# Altium PCB LEDCube.PcbDoc (part 1 of 2)
Units mil, origin at the board's own origin, x right, y up, seen from the top; angles counter-clockwise.
Board outline 4000 x 4000 mil, 4 copper layers (Top Layer, GND, +5, Bottom Layer); 176 components, 214 nets, 658 pads, 213 vias.
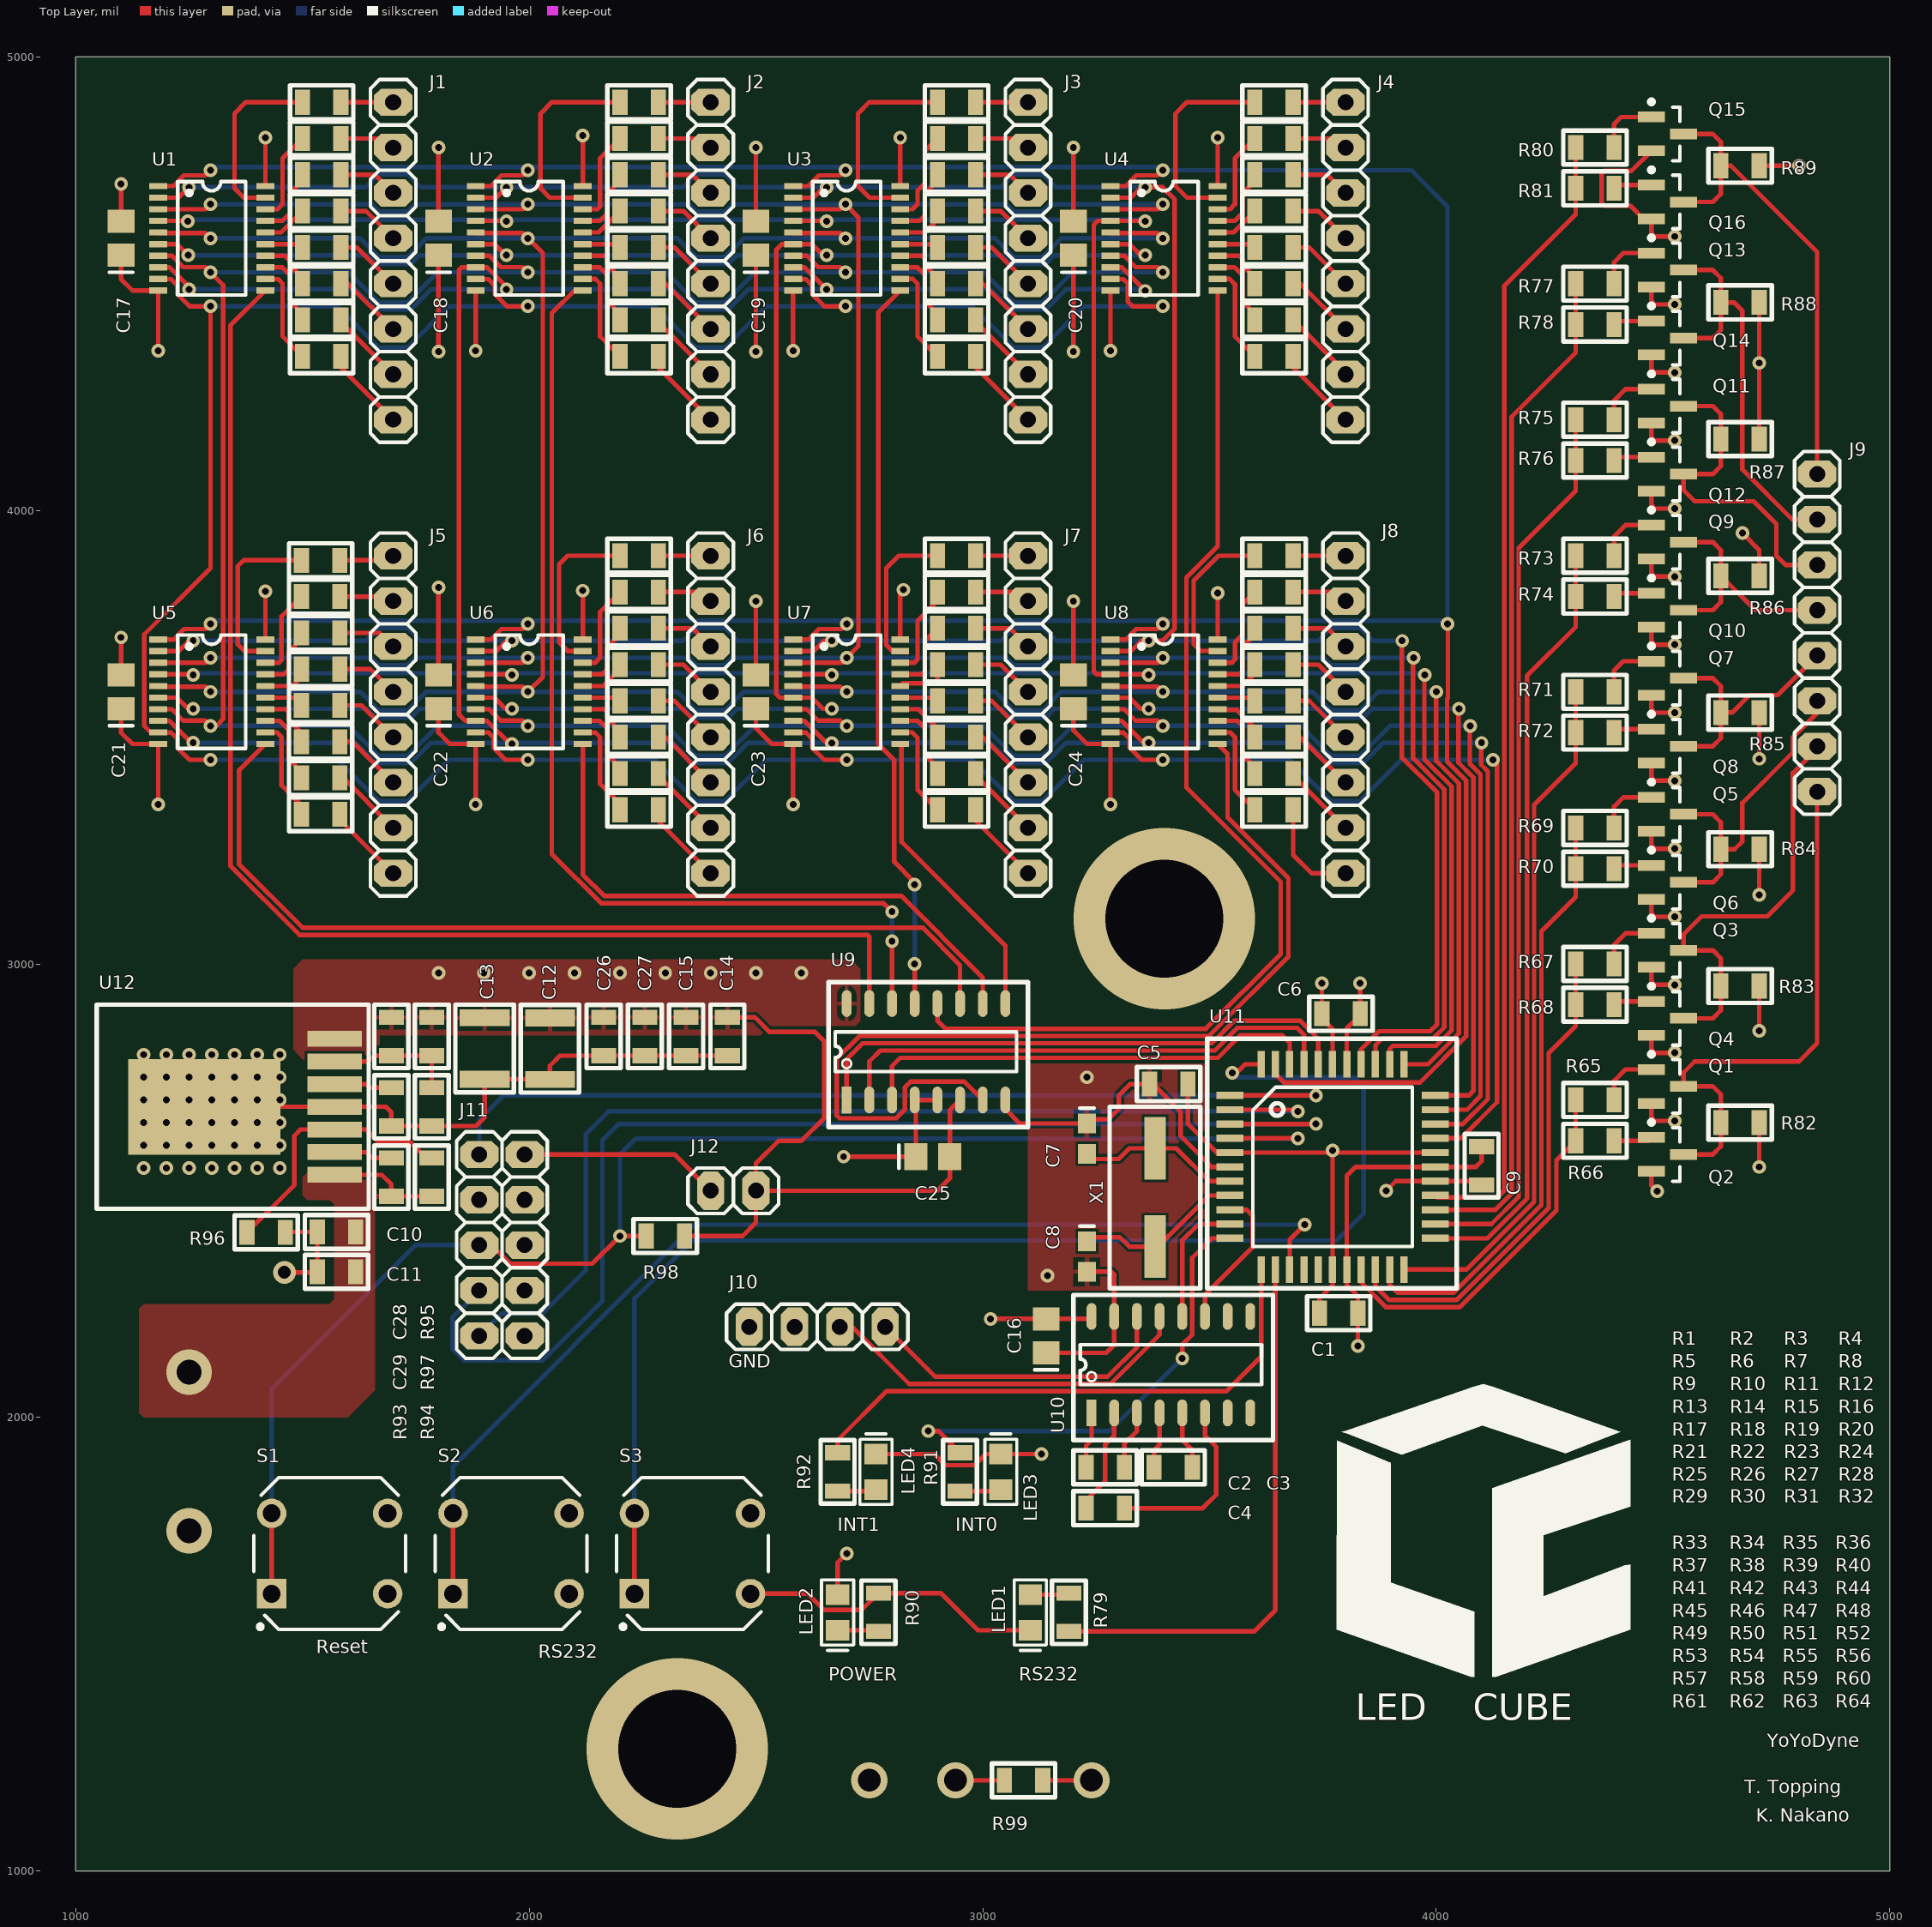
[diagram p0: Top Layer view]
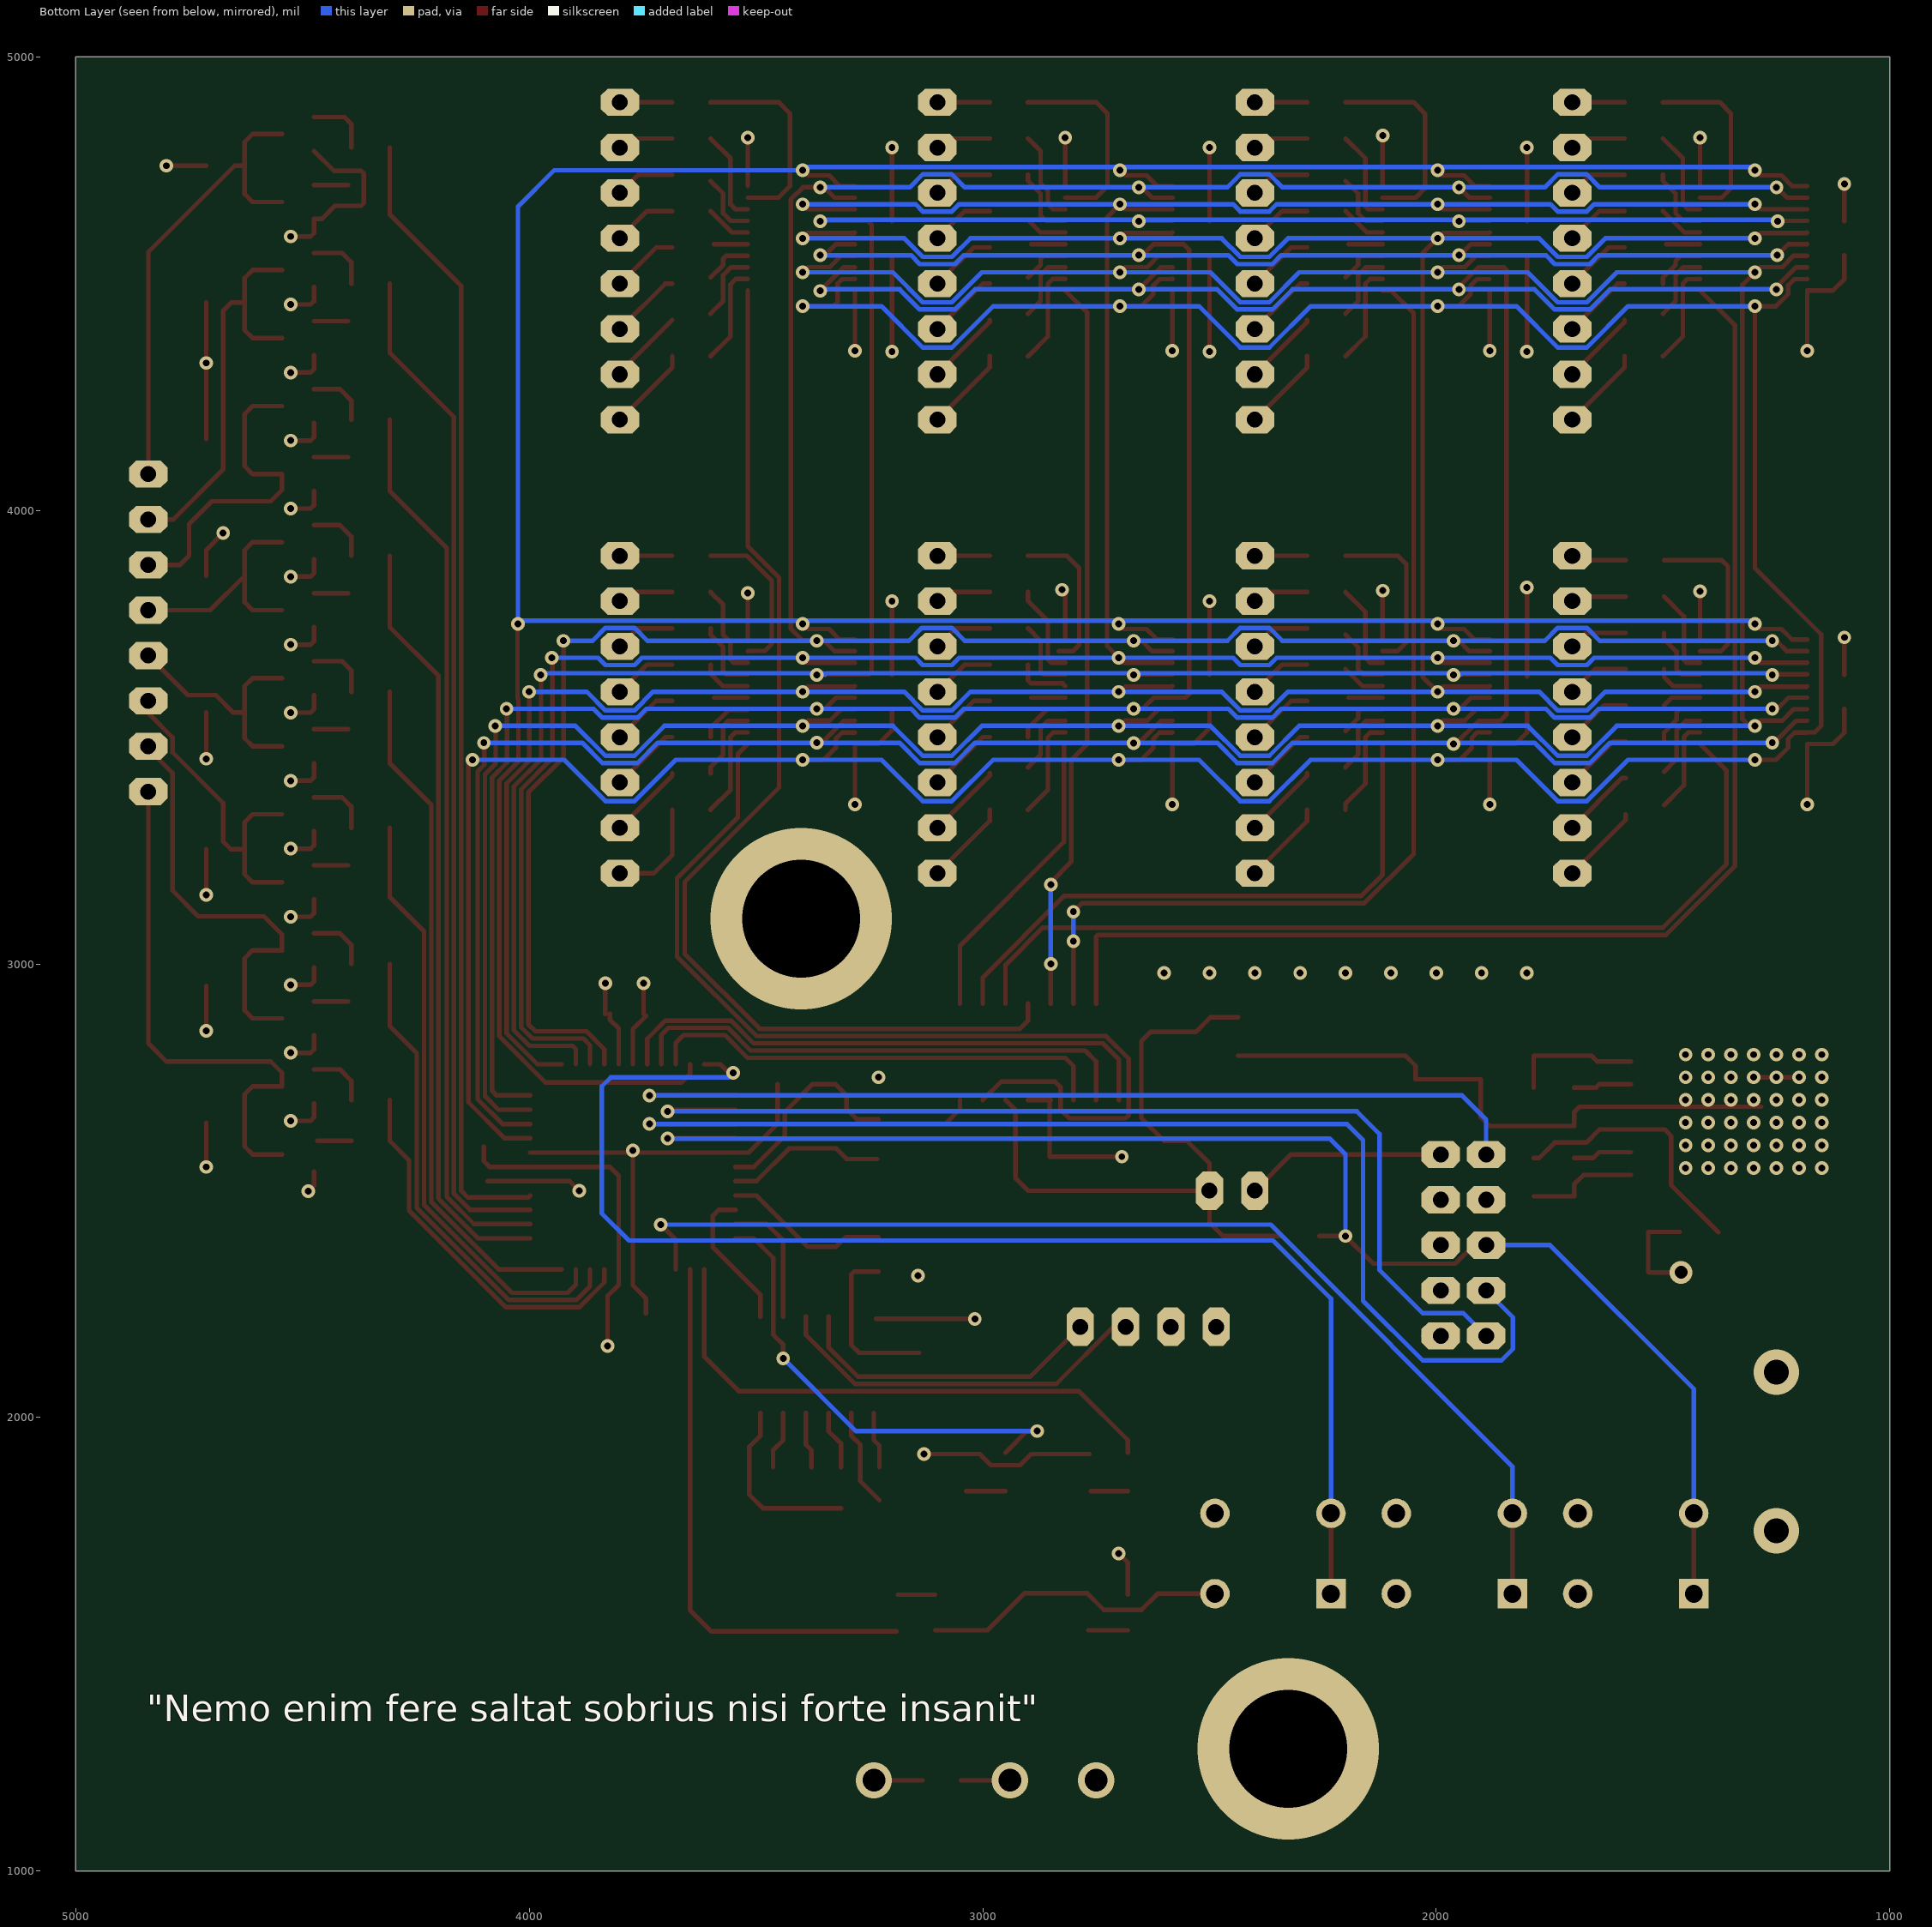
[diagram p1: Bottom Layer view, seen from below]
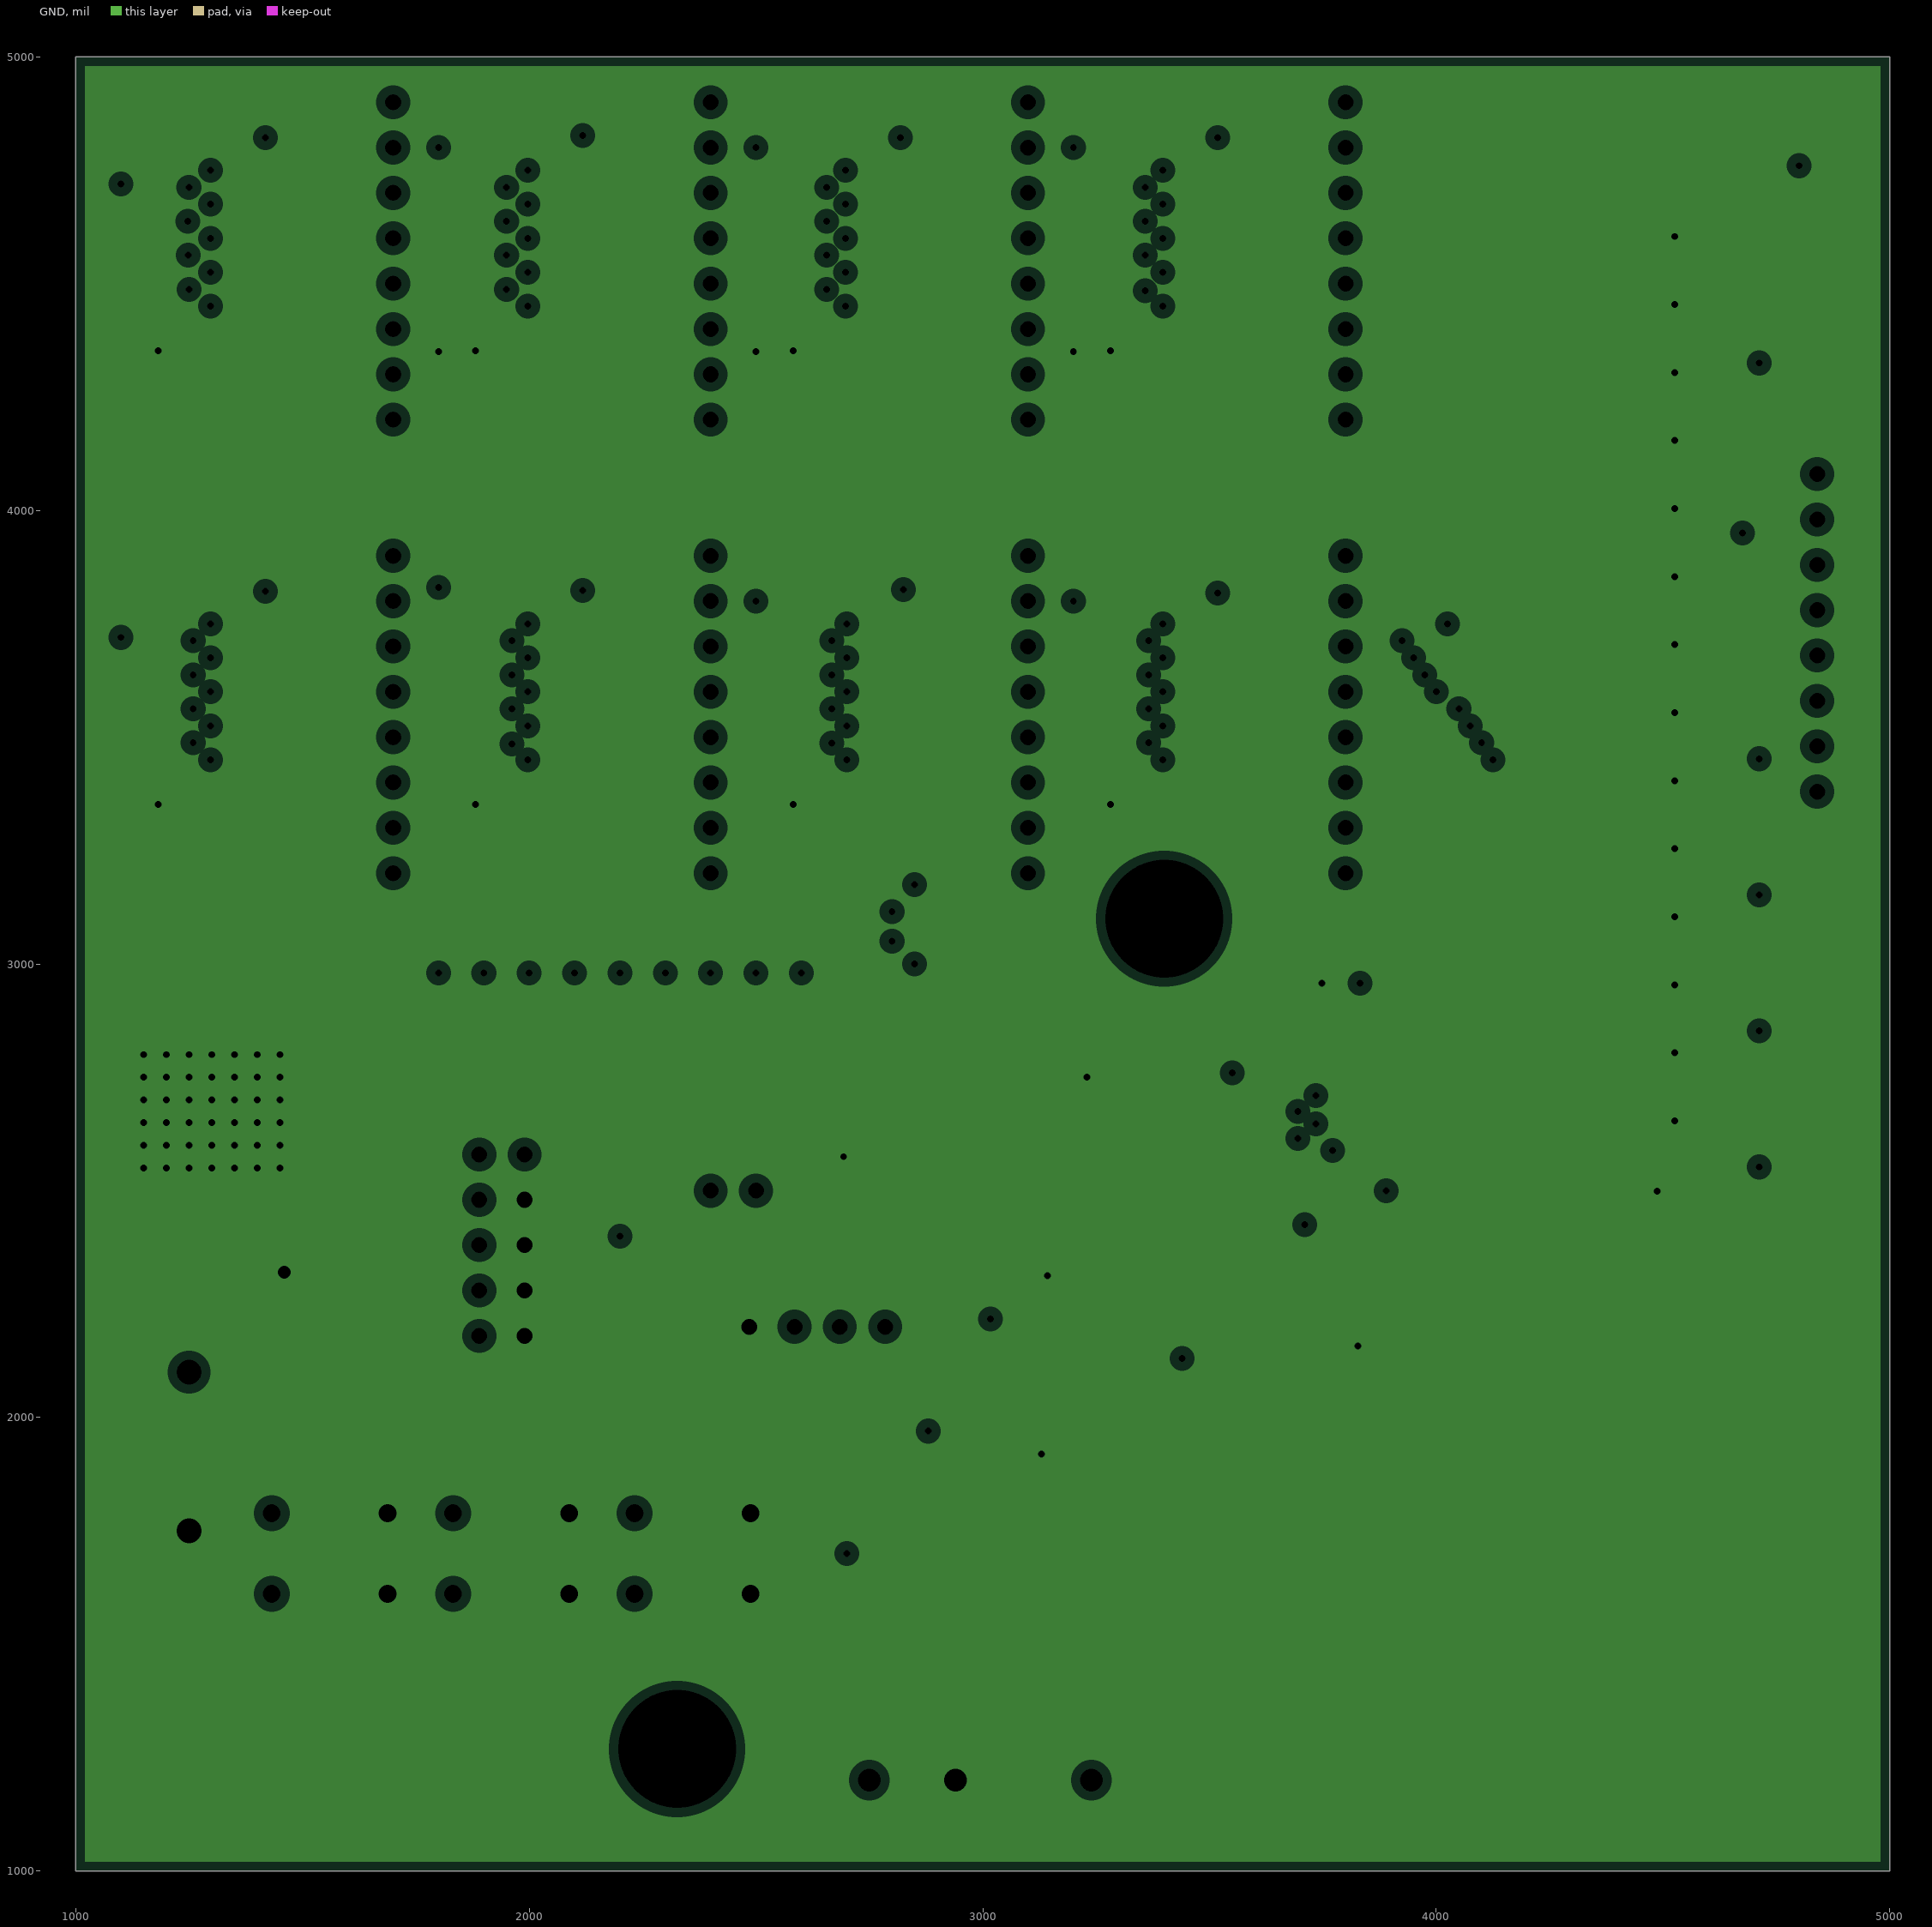
[diagram p2: GND, clearances drawn from the general rule]
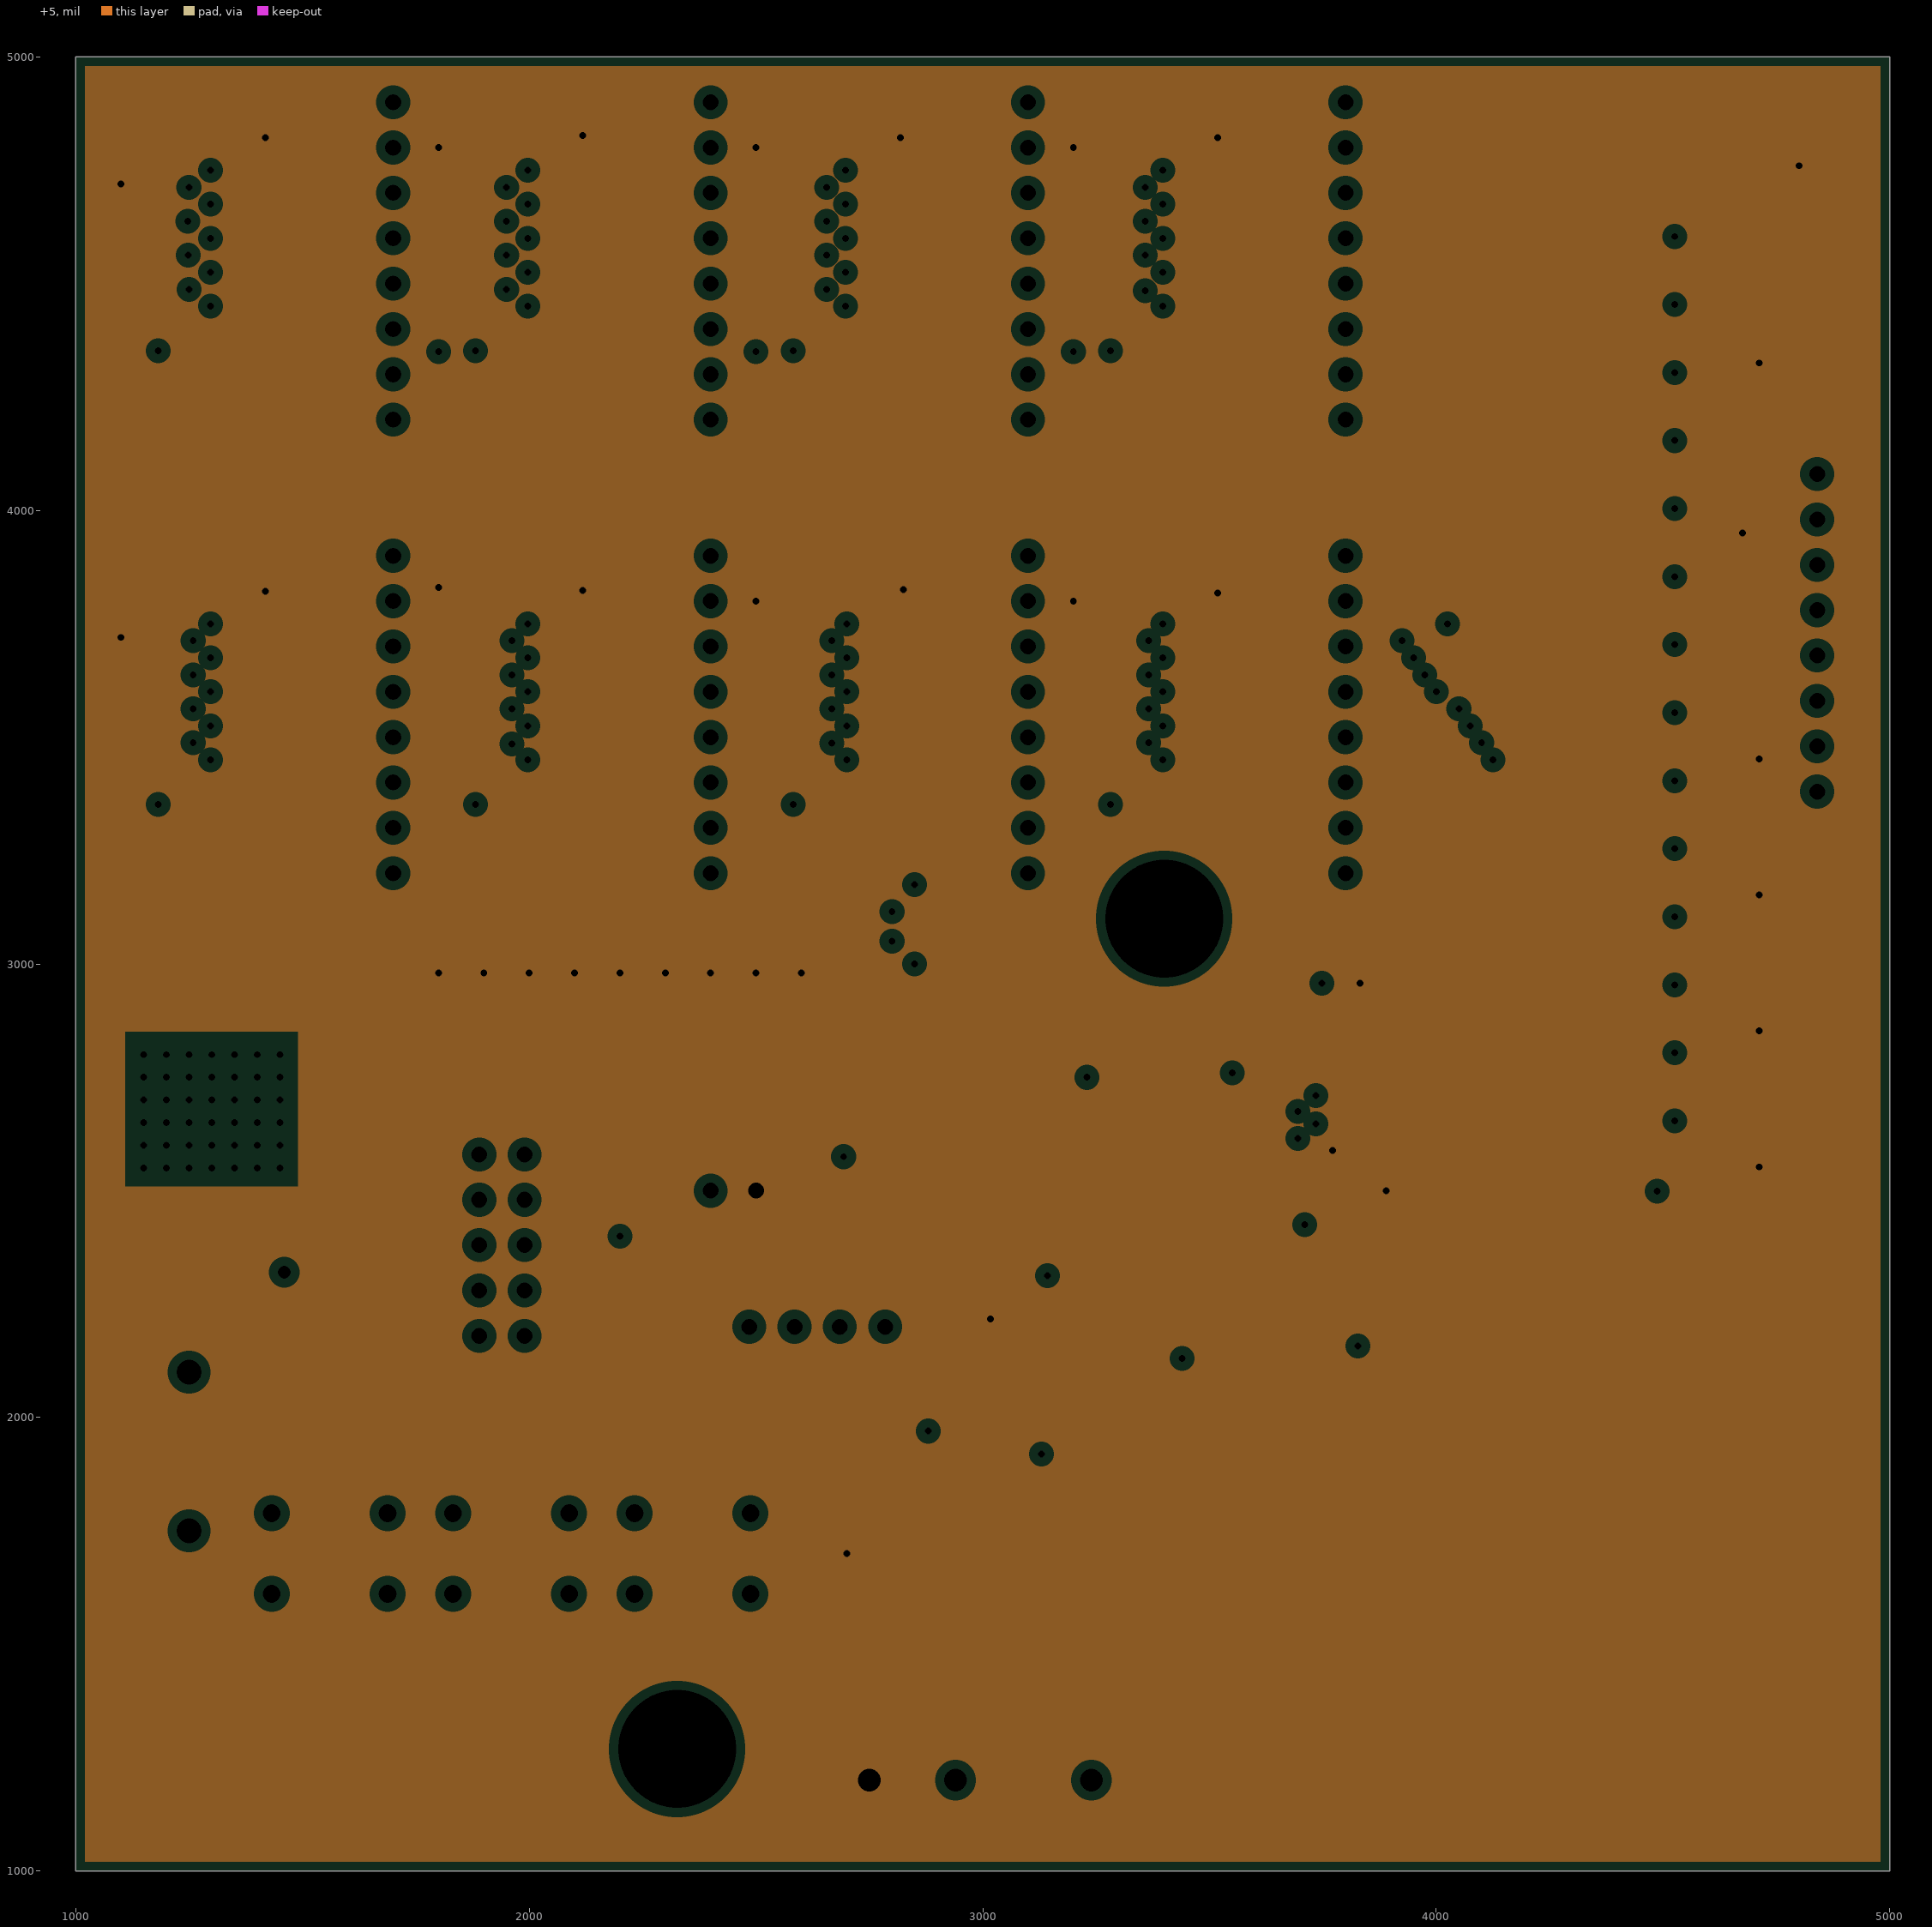
[diagram p3: +5, clearances drawn from the general rule]

## Layer stack, top to bottom
Top Solder: solder mask 0.4, Solder Resist, Dk 3.5
Top Layer: signal copper 1.4
Dielectric1: core 12.6, FR-4, Dk 4.8
GND: plane copper 1.4, net GND
Dielectric2: prepreg 12.6, FR-4, Dk 4.8
+5: plane copper 1.4, net +5
Dielectric3: core 12.6, FR-4, Dk 4.8
Bottom Layer: signal copper 1.4
Bottom Solder: solder mask 0.4, Solder Resist, Dk 3.5

## Board outline
1000,1000 5000,1000 5000,5000 1000,5000

## Design rules (kind name [scope] priority, off if disabled: settings)
Clearance [(InNetClass('All Nets')) vs (InNetClass('All Nets'))] p1: gap=6
ComponentClearance [All] p1: gap=8 collisioncheckmode=3 verticalgap=10 showdistances=FALSE
HoleSize [All] p1: absolutevalues=TRUE maxlimit=1000 minlimit=6 maxpercent=80.000 minpercent=20.000
MinimumSolderMaskSliver [All] p1: minsoldermaskwidth=0
PlaneClearance [All] p1: clearance=20
PlaneConnect [All] p1: planeconnectstyle=Direct reliefexpansion=20 reliefentries=4 reliefconductorwidth=10 reliefairgap=10
PolygonConnect PolygonConnect_1 [(InComponent('C10') OR InComponent('C11') OR InComponent('U12') OR IsVia OR IsTrack)] p1: connectstyle=Direct reliefconductorwidth=10 reliefentries=4 polygonreliefangle="90 Angle" airgapwidth=10
PolygonConnect [All] p2: connectstyle=Relief reliefconductorwidth=10 reliefentries=4 polygonreliefangle="90 Angle" airgapwidth=10
RoomDefinition LEDPower [InComponentClass('LEDPower')] p1: confinementstyle=ConfineIn formatcopy=TRUE lockcomponents=FALSE outline -215,100 7780,100 7780,5660 -215,5660
RoomDefinition LEDMulti [InComponentClass('LEDMulti')] p2: confinementstyle=ConfineIn formatcopy=TRUE lockcomponents=FALSE outline 0,0 6880,0 6880,5860 0,5860
RoomDefinition LEDMicro [InComponentClass('LEDMicro')] p3: confinementstyle=ConfineIn formatcopy=TRUE lockcomponents=FALSE outline 0,0 6320,0 6320,5180 0,5180
RoutingVias [All] p1: holewidth=28 width=50 viastyle="Through Hole" minholewidth=28 minwidth=50 maxholewidth=28 maxwidth=50
SilkToSilkClearance [All] p1: silktosilkclearance=0
SilkToSolderMaskClearance [IsPad] p1: minsilkscreentomaskgap=0 clearancetoexposedcopper=TRUE
SolderMaskExpansion [All] p1: expansion=4
Width [All] p1: maxlimit=10 minlimit=10 preferedwidth=10
22 further rules are at their usual default settings.

## Classes and differential pairs
component class LEDPower: C10 C11 C12 C13 C14 C15 C26 C27 C28 C29 LED2 R90 R93 R94 R95 R96 R97 R99 U12
component class LEDMulti: C17 C18 C19 C20 C21 C22 C23 C24 C25 J1 J2 J3 J4 J5 J6 J7 J8 R1 R2 R3 R4 R5 R6 R7 R8 R9 R10 R11 R12 R13 R14 R15 R16 R17 R18 R19 R20 R21 R22 R23 R24 R25 R26 R27 R28 R29 R30 R31 R32 R33 R34 R35 R36 R37 R38 R39 R40 R41 R42 R43 R44 R45 R46 R47 R48 R49 R50 R51 R52 R53 R54 R55 R56 R57 R58 R59 R60 R61 R62 R63 R64 U1 U2 U3 U4 U5 U6 U7 U8 U9
component class LEDMicro: C1 C2 C3 C4 C5 C6 C7 C8 C9 C16 J9 J10 J11 J12 LED1 LED3 LED4 Q1 Q2 Q3 Q4 Q5 Q6 Q7 Q8 Q9 Q10 Q11 Q12 Q13 Q14 Q15 Q16 R65 R66 R67 R68 R69 R70 R71 R72 R73 R74 R75 R76 R77 R78 R79 R80 R81 R82 R83 R84 R85 R86 R87 R88 R89 R91 R92 R98 S1 S2 S3 U10 U11 X1

## Components (designator, comment, footprint, x,y, rotation, side; value= is the part's Value field where it differs from the comment)
C1 ".1uF" "0805 (2012) Capacitor" 3785,2230 r180 top
C2 ".1uF" "0805 (2012) Capacitor" 3270,1890 r180 top
C3 ".1uF" "0805 (2012) Capacitor" 3420,1890 r180 top
C4 ".1uF" "0805 (2012) Capacitor" 3270,1800 r180 top
C5 ".1uF" "0805 (2012) Capacitor" 3410,2735 r0 top
C6 ".1uF" "0805 (2012) Capacitor" 3790,2890 r0 top
C7 "22pf" 0603 3230,2615 r270 top
C8 "22pf" 0603 3230,2355 r270 top
C9 ".1uF" "0805 (2012) Capacitor" 4100,2555 r270 top
C10 "10uF" "0805 (2012) Capacitor" 1575,2409 r0 top
C11 "1000pF" "0805 (2012) Capacitor" 1575,2321 r0 top
C12 "100uF" "1210 (3225) Capacitor" 2046,2813 r90 top
C13 "100uF" "1210 (3225) Capacitor" 1902,2813.54 r90 top
C14 "10uF" "0805 (2012) Capacitor" 2437,2840.12 r270 top
C15 "10uF" "0805 (2012) Capacitor" 2346,2840 r270 top
C16 "C0805" 0805 3140,2180 r90 top
C17 "C0805" 0805 1100,4600 r90 top
C18 "C0805" 0805 1800,4600 r90 top
C19 "C0805" 0805 2500,4600 r90 top
C20 "C0805" 0805 3200,4600 r90 top
C21 "C0805" 0805 1100,3600 r90 top
C22 "C0805" 0805 1800,3600 r90 top
C23 "C0805" 0805 2500,3600 r90 top
C24 "C0805" 0805 3200,3600 r90 top
C25 "C0805" 0805 2890,2575 r0 top
C26 "1000pF" "0805 (2012) Capacitor" 2164,2840 r270 top
C27 "1000pF" "0805 (2012) Capacitor" 2255,2840 r270 top
C28 ".022uf" "0805 (2012) Capacitor" 1696,2840.12 r270 top
C29 ".022uF" "0805 (2012) Capacitor" 1696,2685 r90 top
J1 "8x1 Male Header Pin" "Male 8x1" 1700,4900 r270 top
J2 "8x1 Male Header Pin" "Male 8x1" 2400,4900 r270 top
J3 "8x1 Male Header Pin" "Male 8x1" 3100,4900 r270 top
J4 "8x1 Male Header Pin" "Male 8x1" 3800,4900 r270 top
J5 "8x1 Male Header Pin" "Male 8x1" 1700,3900 r270 top
J6 "8x1 Male Header Pin" "Male 8x1" 2400,3900 r270 top
J7 "8x1 Male Header Pin" "Male 8x1" 3100,3900 r270 top
J8 "8x1 Male Header Pin" "Male 8x1" 3800,3900 r270 top
J9 "8x1" "Male 8x1" 4840,3380 r90 top
J10 "4x1" "Male 4x1" 2785,2200 r180 top
J11 "5x2" "Male 5x2" 1890,2580 r270 top
J12 "2x1" "Male 2X1" 2500,2500 r180 top
LED1 "LED" "LED 0805" 3105,1570 r90 top
LED2 "LED" "LED 0805" 2680,1570 r90 top
LED3 "LED" "LED 0805" 3040,1880 r270 top
LED4 "LED" "LED 0805" 2764.45,1880 r270 top
Q1 "2222" SOT-23 4510,2730 r0 top
Q2 "2222" SOT-23 4510,2580 r0 top
Q3 "2222" SOT-23 4510,3030 r0 top
Q4 "2222" SOT-23 4510,2880 r0 top
Q5 "2222" SOT-23 4510,3330 r0 top
Q6 "2222" SOT-23 4510,3180 r0 top
Q7 "2222" SOT-23 4510,3630 r0 top
Q8 "2222" SOT-23 4510,3480 r0 top
Q9 "2222" SOT-23 4510,3930 r0 top
Q10 "2222" SOT-23 4510,3780 r0 top
Q11 "2222" SOT-23 4510,4230 r0 top
Q12 "2222" SOT-23 4510,4080 r0 top
Q13 "2222" SOT-23 4510,4530 r0 top
Q14 "2222" SOT-23 4510,4380 r0 top
Q15 "2222" SOT-23 4510,4830 r0 top
Q16 "2222" SOT-23 4510,4680 r0 top
R1 "100" "R 0805 (2012) RESISTOR" 1542.32,4900 r0 top
R2 "100" "R 0805 (2012) RESISTOR" 2242.32,4900 r0 top
R3 "100" "R 0805 (2012) RESISTOR" 2942.32,4900 r0 top
R4 "100" "R 0805 (2012) RESISTOR" 3642.32,4900 r0 top
R5 "100" "R 0805 (2012) RESISTOR" 1542.32,4820 r0 top
R6 "100" "R 0805 (2012) RESISTOR" 2242.32,4820 r0 top
R7 "100" "R 0805 (2012) RESISTOR" 2942.32,4820 r0 top
R8 "100" "R 0805 (2012) RESISTOR" 3642.32,4820 r0 top
R9 "100" "R 0805 (2012) RESISTOR" 1542.32,4740 r0 top
R10 "100" "R 0805 (2012) RESISTOR" 2242.32,4740 r0 top
R11 "100" "R 0805 (2012) RESISTOR" 2942.32,4740 r0 top
R12 "100" "R 0805 (2012) RESISTOR" 3642.32,4740 r0 top
R13 "100" "R 0805 (2012) RESISTOR" 1542.32,4660 r0 top
R14 "100" "R 0805 (2012) RESISTOR" 2242.32,4660 r0 top
R15 "100" "R 0805 (2012) RESISTOR" 2942.32,4660 r0 top
R16 "100" "R 0805 (2012) RESISTOR" 3642.32,4660 r0 top
R17 "100" "R 0805 (2012) RESISTOR" 1542.32,4580 r0 top
R18 "100" "R 0805 (2012) RESISTOR" 2242.32,4580 r0 top
R19 "100" "R 0805 (2012) RESISTOR" 2942.32,4580 r0 top
R20 "100" "R 0805 (2012) RESISTOR" 3642.32,4580 r0 top
R21 "100" "R 0805 (2012) RESISTOR" 1542.32,4500 r0 top
R22 "100" "R 0805 (2012) RESISTOR" 2242.32,4500 r0 top
R23 "100" "R 0805 (2012) RESISTOR" 2942.32,4500 r0 top
R24 "100" "R 0805 (2012) RESISTOR" 3642.32,4500 r0 top
R25 "100" "R 0805 (2012) RESISTOR" 1542.32,4420 r0 top
R26 "100" "R 0805 (2012) RESISTOR" 2242.32,4420 r0 top
R27 "100" "R 0805 (2012) RESISTOR" 2942.32,4420 r0 top
R28 "100" "R 0805 (2012) RESISTOR" 3642.32,4420 r0 top
R29 "100" "R 0805 (2012) RESISTOR" 1542.32,4340 r0 top
R30 "100" "R 0805 (2012) RESISTOR" 2242.32,4340 r0 top
R31 "100" "R 0805 (2012) RESISTOR" 2942.32,4340 r0 top
R32 "100" "R 0805 (2012) RESISTOR" 3642.32,4340 r0 top
R33 "100" "R 0805 (2012) RESISTOR" 1540,3890 r0 top
R34 "100" "R 0805 (2012) RESISTOR" 2242.32,3900 r0 top
R35 "100" "R 0805 (2012) RESISTOR" 2942.32,3900 r0 top
R36 "100" "R 0805 (2012) RESISTOR" 3642.32,3900 r0 top
R37 "100" "R 0805 (2012) RESISTOR" 1540,3810 r0 top
R38 "100" "R 0805 (2012) RESISTOR" 2242.32,3820 r0 top
R39 "100" "R 0805 (2012) RESISTOR" 2942.32,3820 r0 top
R40 "100" "R 0805 (2012) RESISTOR" 3642.32,3820 r0 top
R41 "100" "R 0805 (2012) RESISTOR" 1540,3730 r0 top
R42 "100" "R 0805 (2012) RESISTOR" 2242.32,3740 r0 top
R43 "100" "R 0805 (2012) RESISTOR" 2942.32,3740 r0 top
R44 "100" "R 0805 (2012) RESISTOR" 3642.32,3740 r0 top
R45 "100" "R 0805 (2012) RESISTOR" 1540,3650 r0 top
R46 "100" "R 0805 (2012) RESISTOR" 2242.32,3660 r0 top
R47 "100" "R 0805 (2012) RESISTOR" 2942.32,3660 r0 top
R48 "100" "R 0805 (2012) RESISTOR" 3642.32,3660 r0 top
R49 "100" "R 0805 (2012) RESISTOR" 1540,3570 r0 top
R50 "100" "R 0805 (2012) RESISTOR" 2242.32,3580 r0 top
R51 "100" "R 0805 (2012) RESISTOR" 2942.32,3580 r0 top
R52 "100" "R 0805 (2012) RESISTOR" 3642.32,3580 r0 top
R53 "100" "R 0805 (2012) RESISTOR" 1540,3490 r0 top
R54 "100" "R 0805 (2012) RESISTOR" 2242.32,3500 r0 top
R55 "100" "R 0805 (2012) RESISTOR" 2942.32,3500 r0 top
R56 "100" "R 0805 (2012) RESISTOR" 3642.32,3500 r0 top
R57 "100" "R 0805 (2012) RESISTOR" 1540,3410 r0 top
R58 "100" "R 0805 (2012) RESISTOR" 2242.32,3420 r0 top
R59 "100" "R 0805 (2012) RESISTOR" 2942.32,3420 r0 top
R60 "100" "R 0805 (2012) RESISTOR" 3642.32,3420 r0 top
R61 "100" "R 0805 (2012) RESISTOR" 1540,3330 r0 top
R62 "100" "R 0805 (2012) RESISTOR" 2242.32,3340 r0 top
R63 "100" "R 0805 (2012) RESISTOR" 2942.32,3340 r0 top
R64 "100" "R 0805 (2012) RESISTOR" 3642.32,3340 r0 top
R65 "1K" "R 0805 (2012) RESISTOR" 4350,2700 r0 top
R66 "1K" "R 0805 (2012) RESISTOR" 4350,2610 r0 top
R67 "1K" "R 0805 (2012) RESISTOR" 4350,3000 r0 top
R68 "1K" "R 0805 (2012) RESISTOR" 4350,2910 r0 top
R69 "1K" "R 0805 (2012) RESISTOR" 4350,3300 r0 top
R70 "1K" "R 0805 (2012) RESISTOR" 4350,3210 r0 top
R71 "1K" "R 0805 (2012) RESISTOR" 4350,3600 r0 top
R72 "1K" "R 0805 (2012) RESISTOR" 4350,3510 r0 top
R73 "1K" "R 0805 (2012) RESISTOR" 4350,3900 r0 top
R74 "1K" "R 0805 (2012) RESISTOR" 4350,3810 r0 top
R75 "1K" "R 0805 (2012) RESISTOR" 4350,4200 r0 top
R76 "1K" "R 0805 (2012) RESISTOR" 4350,4110 r0 top
R77 "1K" "R 0805 (2012) RESISTOR" 4350,4500 r0 top
R78 "1K" "R 0805 (2012) RESISTOR" 4350,4410 r0 top
R79 "1K" "R 0805 (2012) RESISTOR" 3190,1570.47 r90 top
R80 "1K" "R 0805 (2012) RESISTOR" 4350,4800 r0 top
R81 "1K" "R 0805 (2012) RESISTOR" 4350,4710 r0 top
R82 "1K" "R 0805 (2012) RESISTOR" 4670,2650 r180 top
R83 "1K" "R 0805 (2012) RESISTOR" 4670,2951.43 r180 top
R84 "1K" "R 0805 (2012) RESISTOR" 4670,3252.86 r180 top
R85 "1K" "R 0805 (2012) RESISTOR" 4670,3554.29 r180 top
R86 "1K" "R 0805 (2012) RESISTOR" 4670,3855.71 r180 top
R87 "1K" "R 0805 (2012) RESISTOR" 4670,4157.14 r180 top
R88 "1K" "R 0805 (2012) RESISTOR" 4670,4458.57 r180 top
R89 "1K" "R 0805 (2012) RESISTOR" 4670,4760 r180 top
R90 "1K" "0805 (2012) Capacitor" 2770,1570.47 r90 top
R91 "1K" "R 0805 (2012) RESISTOR" 2950,1880 r270 top
R92 "1K" "R 0805 (2012) RESISTOR" 2680,1880 r270 top
R93 "100K" "R 0805 (2012) RESISTOR" 1696,2529.88 r270 top
R94 "3.74K" "R 0805 (2012) RESISTOR" 1785,2529.88 r270 top
R95 "5.62K" "R 0805 (2012) RESISTOR" 1785,2840.12 r270 top
R96 "1.07K" "R 0805 (2012) RESISTOR" 1420,2408 r180 top
R97 "1.07K" "R 0805 (2012) RESISTOR" 1785,2685 r270 top
R98 "1K" "R 0805 (2012) RESISTOR" 2300,2400 r0 top
R99 "270" "0805 (2012) Capacitor" 3090,1200 r180 top
S1 "Button" B3F-1000 1560,1700 r0 top
S2 "Button" B3F-1000 1960,1700 r0 top
S3 "Button" B3F-1000 2360,1700 r0 top
U1 "SN74HC574NSR" "TSSOP 20" 1300,4600 r0 top
U2 "SN74HC574NSR" "TSSOP 20" 2000,4600 r0 top
U3 "SN74HC574NSR" "TSSOP 20" 2700,4600 r0 top
U4 "SN74HC574NSR" "TSSOP 20" 3400,4600 r0 top
U5 "SN74HC574NSR" "TSSOP 20" 1300,3600 r0 top
U6 "SN74HC574NSR" "TSSOP 20" 2000,3600 r0 top
U7 "SN74HC574NSR" "TSSOP 20" 2700,3600 r0 top
U8 "SN74HC574NSR" "TSSOP 20" 3400,3600 r0 top
U9 "SN74HC138N" SOP16 2700,2700 r90 top
U10 "MAX232" SOP16 3240,2010 r90 top
U11 "Atmega22" Quad44 3545,2710 r0 top
U12 "LMZ12003" "7-Lead PFM" 1571,2685 r90 top
X1 "14.756Mhz Xtal" PCBComponent_1 3380,2485 r90 top

## Footprints (in the part's own frame and the unit in brackets; to place one, negate y for a bottom-side part, rotate by r counter-clockwise, add the part's x,y. Pads: shape width x height; smd on the part's side, far side on the other; paste and mask are expansions set on the pad)
"7-Lead PFM" [mm] "Non-Isolated PoL Module TI"
  rect 0.89x3.06 smd: 1(-3.81,0) 2(-2.54,0) 3(-1.27,0) 4(0,0) 5(1.27,0) 6(2.54,0) 7(3.81,0)
  rect 5.35x8.54 smd: 8(0,7.305)
  silkscreen extent -5.72,-1.91 5.71,13.33, body extent -5.08,-1.17 5.08,12.6, height 4.57
0603 [mm] "Chip Capacitor; Body 1.6 x 0.8 mm (LxW typ)"
  rect 1.1x1 smd: 1(-0.85,0) 2(0.85,0)
  silkscreen extent -1.7,-0.4 -1.7,0.4
0805 [mm] "Chip Capacitor; Body 2.0 x 1.2 mm (LxW typ)"
  rect 1.3x1.5 smd: 1(-0.95,0) 2(0.95,0)
  silkscreen extent -1.9,-0.65 -1.9,0.65
"0805 (2012) Capacitor" [mm] "0805 (2012) Capacitor"
  rect 0.85x1.4 smd: 1(-1.075,0) 2(1.075,0)
  silkscreen extent -1.78,-0.95 1.78,0.95, body extent -1.19,-0.65 1.19,0.65, height 0.85
"1210 (3225) Capacitor" [mm] "1210 (3225) Capacitor"
  rect 0.95x2.8 smd: 1(-1.725,0) 2(1.725,0)
  silkscreen extent -2.45,-1.63 2.45,1.65, body extent -1.83,-1.43 1.83,1.43, height 1.81
B3F-1000 [mm] "OMRON Electronics Pushbutton Tactile SPST-NO 0.05A 24V"
  rect 1.65x1.65 hole 1: 1(-3.25,-2.25)
  round 1.65 hole 1: 2(3.25,-2.25) 3(-3.25,2.25) 4(3.25,2.25)
  silkscreen extent -4.25,-4.25 4.25,4.25, body extent -3.81,-3 3.89,3, height 4.3
"LED 0805" [mm]
  rect 1.15x1.3 smd: 1(-1,0) 2(1,0)
  silkscreen extent -2.12,-0.9 1.83,0.9, body extent -1,-0.63 1,0.62, height 0.8
"Male 2X1" [mil]
  oct 60x85 hole 35: 1(0,0) 2(100,0)
  silkscreen extent -50,-50 150,50, body extent -50,-50 150,50, height 460
"Male 4x1" [mil]
  oct 60x85 hole 35: 1(0,0) 2(100,0) 3(200,0) 4(300,0)
  silkscreen extent -50,-50 350,50, body extent -50,-50 350,50, height 460
"Male 5x2" [mil]
  oct 60x85 hole 35: 1(0,0) 2(100,0) 3(200,0) 4(300,0) 5(400,0) 6(0,100) 7(100,100) 8(200,100) 9(300,100) 10(400,100)
  silkscreen extent -50,-50 450,150, body extent -50,-50 450,150, height 460
"Male 8x1" [mil]
  oct 60x85 hole 35: 1(0,0) 2(100,0) 3(200,0) 4(300,0) 5(400,0) 6(500,0) 7(600,0) 8(700,0)
  silkscreen extent -50,-50 750,50, body extent -50,-50 750,50, height 460
PCBComponent_1 [mm]
  rect 3.5x1.2 smd: 1(-2.75,0) 2(2.75,0)
  silkscreen extent -5.08,-2.54 5.08,2.54, body extent -3.83,-2.08 3.77,2.02, height 2.3
Quad44 [mm]
  rect 1.5x0.406 smd: 1(0,0) 2(0,-0.8) 3(0,-1.6) 4(0,-2.4) 5(0,-3.2) 6(0,-4) 7(0,-4.8) 8(0,-5.6) 9(0,-6.4) 10(0,-7.2) 11(0,-8) 23(11.5,-8) 24(11.5,-7.2) 25(11.5,-6.4) 26(11.5,-5.6) 27(11.5,-4.8) 28(11.5,-4) 29(11.5,-3.2) 30(11.5,-2.4) 31(11.5,-1.6) 32(11.5,-0.8) 33(11.5,0)
  rect 0.406x1.5 smd: 12(1.75,-9.75) 13(2.55,-9.75) 14(3.35,-9.75) 15(4.15,-9.75) 16(4.95,-9.75) 17(5.75,-9.75) 18(6.55,-9.75) 19(7.35,-9.75) 20(8.15,-9.75) 21(8.95,-9.75) 22(9.75,-9.75) 34(9.75,1.75) 35(8.95,1.75) 36(8.15,1.75) 37(7.35,1.75) 38(6.55,1.75) 39(5.75,1.75) 40(4.95,1.75) 41(4.15,1.75) 42(3.35,1.75) 43(2.55,1.75) 44(1.75,1.75)
  silkscreen extent -1.27,-10.79 12.7,3.17, body extent -0.27,-10 11.75,2.02, height 1
"R 0805 (2012) RESISTOR" [mm] "0805 (2012) Resistor"
  rect 0.85x1.4 smd: 1(-1.075,0) 2(1.075,0)
  silkscreen extent -1.78,-0.95 1.78,0.95, body extent -1.19,-0.65 1.19,0.65, height 0.85
SOP16 [mm]
  rect 1.5x0.55 smd: 1(0,0)
  oval 1.5x0.55 smd: 2(0,-1.27) 3(0,-2.54) 4(0,-3.81) 5(0,-5.08) 6(0,-6.35) 7(0,-7.62) 8(0,-8.89) 9(5.4,-8.89) 10(5.4,-7.62) 11(5.4,-6.35) 12(5.4,-5.08) 13(5.4,-3.81) 14(5.4,-2.54) 15(5.4,-1.27) 16(5.4,0)
  silkscreen extent -1.52,-10.16 6.6,1.02, body extent -0.31,-9.45 5.69,0.55, height 1.75
SOT-23 [mm] "SOT23, 3-Leads, Body 3.0x2.5mm (max), Pitch 0.95mm, IPC Medium Density"
  rect 1.5x0.6 smd: 1(-0.9,0.95) 2(-0.9,-0.95) 3(0.9,0)
  silkscreen extent -1.02,-1.5 0.7,1.92, body extent -0.7,-1.5 0.7,1.5, height 1.1
"TSSOP 20" [mm] "R PDSO G20, TI"
  rect 1x0.35 smd: 1(-3,2.925) 2(-3,2.275) 3(-3,1.625) 4(-3,0.975) 5(-3,0.325) 6(-3,-0.325) 7(-3,-0.975) 8(-3,-1.625) 9(-3,-2.275) 10(-3,-2.925) 11(3,-2.925) 12(3,-2.275) 13(3,-1.625) 14(3,-0.975) 15(3,-0.325) 16(3,0.325) 17(3,0.975) 18(3,1.625) 19(3,2.275) 20(3,2.925)
  silkscreen extent -1.91,-3.17 1.91,3.17, body extent -3.28,-3.3 3.27,3.3, height 1.2

## Part data
C1 C2 C3 C4 C5 C6 C7 C8 C9 C10 C11 C12 C13 C14 C15 C26 C27 C28 C29: library part "Capacitor (non-polarized)", "Capacitor"
C16 C17 C18 C19 C20 C21 C22 C23 C24 C25: "Ceramic Chip Capacitor - Standard"
J1 J2 J3 J4 J5 J6 J7 J8 J9: "8x1 100mil Header"
J10: "4x1 100mil Header"
J11: "5x2 100mil Header"
J12: "2x1 100mil Header"
LED1 LED2 LED3 LED4: "Standard LED"
Q1 Q2 Q3 Q4 Q5 Q6 Q7 Q8 Q9 Q10 Q11 Q12 Q13 Q14 Q15 Q16: library part MMST2222A, "Trans NPN Bipolar 40V"
R1 R2 R3 R4 R5 R6 R7 R8 R9 R10 R11 R12 R13 R14 R15 R16 R17 R18 R19 R20 R21 R22 R23 R24 R25 R26 R27 R28 R29 R30 R31 R32 R33 R34 R35 R36 R37 R38 R39 R40 R41 R42 R43 R44 R45 R46 R47 R48 R49 R50 R51 R52 R53 R54 R55 R56 R57 R58 R59 R60 R61 R62 R63 R64 R65 R66 R67 R68 R69 R70 R71 R72 R73 R74 R75 R76 R77 R78 R79 R80 R81 R82 R83 R84 R85 R86 R87 R88 R89 R91 R92 R93 R94 R95 R96 R97 R98: library part "RES 0805 1K 1%"
R90 R99: library part Resistor, "Resistor"
U1 U2 U3 U4 U5 U6 U7 U8: "IC D-TYPE POS TRG SNGL 20SO"
U9: library part SN4HC138N, "IC DECODER/DEMUX 3-8 LINE 16SO"
U10: "IC DUAL EIA-232 DRVR/RCVR 16SOIC"
U11: library part "ATMEGA 32", "IC MCU 8BIT 8KB FLASH 44TQFP"
X1: library part Crystal

## Via types
v1: diameter 30, hole 15, Top Layer to Bottom Layer, 205 vias
v2: diameter 80, hole 50, Top Layer to Bottom Layer, 3 vias
v3: diameter 400, hole 260, Top Layer to Bottom Layer, 2 vias
v4: diameter 100, hole 55, Top Layer to Bottom Layer, 2 vias
v5: diameter 50, hole 28, Top Layer to Bottom Layer, 1 vias

## Nets (pads, with @x,y where several pads share a name; then routed paths per layer and width w, separated by ;. In a path a pad name is that pad's centre, name@x,y a point inside that pad or via, vN(x,y) a via of type N, cw(c..) or ccw(c..) an arc to the next point about the centre after c; other vN are vias at no path point)
232LED: R79.1 U11.13 | length 1225.7
  Top Layer w10: R79.1@3190,1528.15 3598.15,1528.15 3645.39,1575.39 U11.13@3645.39,2326.14
+5: C1.2 C5.2 C6.2 C9.2 C12.2 C13.2 C14.1 C15.1 C16.2 C17.2 C18.2 C19.2 C20.2 C21.2 C22.2 C23.2 C24.2 C25.2 C26.1 C27.1 C28.1 J12.1 LED2.2 R82.1 R83.1 R84.1 R85.1 R86.1 R87.1 R88.1 R89.1 R95.1 R98.2 U1.20 U2.20 U3.20 U4.20 U5.20 U6.20 U7.20 U8.20 U9.6 U9.16 U10.16 U11.5 U11.17 U11.27 U11.29 U11.38 U12.7 | length 6192.4
  Top Layer w10: C21.2@1100,3637.4 v1(1100,3720) ; C17.2@1100,4637.4 v1(1100,4720) ; U5.20@1418.11,3715.16 v1(1418.11,3821.89) ; U1.20@1418.11,4715.16 v1(1418.11,4821.89) ; C22.2@1800,3633.27 C22.2@1800,3637.4 v1(1800,3830) ; C18.2@1800,4637.4 v1(1800,4800) ; U6.20@2118.11,3715.16 v1(2118.11,3823.11) ; U2.20@2118.11,4715.16 v1(2118.11,4826.89) ; R98.2@2342.32,2400 2470,2400 2500,2430 J12.1@2500,2500 ; C14.1@2437,2882.44 2497.56,2882.44 2530,2850 2630,2850 2650,2830 2650,2660 2600,2610 2550,2610 2500,2560 J12.1@2500,2500 ; C23.2@2500,3637.4 v1(2500,3800) ; C19.2@2500,4637.4 v1(2500,4800) ; LED2.2@2680,1609.37 2680,1680 v1(2700,1700) ; U7.20@2818.11,3715.16 2818.11,3818.11 v1(2825,3825) ; U3.20@2818.11,4715.16 v1(2818.11,4821.89) ; U9.6@2950,2700 2927.4,2677.4 C25.2@2927.4,2575 2927.4,2527.4 2900,2500 J12.1@2500,2500 ; v1(3017.4,2217.4) C16.2@3140,2217.4 U10.16@3234.8,2217.4 ; C24.2@3200,3637.4 v1(3200,3800) ; C20.2@3200,4637.4 v1(3200,4800) ; C5.2@3452.32,2735 3452.32,2647.68 3515.98,2584.02 U11.5@3545,2584.02 v1@3766.77,2584.02 ; U8.20@3518.11,3715.16 v1(3518.11,3818.11) ; U4.20@3518.11,4715.16 v1(3518.11,4821.89) ; C1.2@3742.68,2230 3742.68,2262.68 3771.38,2291.38 U11.17@3771.38,2326.14 v1(3771.38,2588.62) 3775.98,2584.02 U11.29@3997.76,2584.02 ; U11.38@3802.87,2778.9 3802.87,2857.87 3822.32,2877.32 C6.2@3822.32,2890 ; C6.2@3832.32,2890 v1(3832.32,2957.68) ; v1(3890,2500) 3911.02,2521.02 U11.27@3997.76,2521.02 C9.2@4091.65,2521.02 ; v1(4675,3950) 4712.32,3912.68 R86.1@4712.32,3855.71 ; v1(4712.32,2552.32) R82.1@4712.32,2650 ; v1(4712.32,2852.68) R83.1@4712.32,2951.43 ; v1(4712.32,3152.32) R84.1@4712.32,3252.86 ; v1(4712.32,3452.32) R85.1@4712.32,3554.29 ; R87.1@4712.32,4157.14 R88.1@4712.32,4458.57 ; R89.1@4712.32,4760 v1(4800,4760)
  other v1: 1800,2980 1900,2980 2000,2980 2100,2980 2200,2980 2300,2980 2400,2980 2500,2980 2600,2980 4712.32,4325
  other v2: 2750,1200
+12: C10.2 C11.2 R93.2 R94.2 U12.1 | length 249.1
  Top Layer w10: U12.1@1571,2535 1675,2535 1696,2514 R93.2@1696,2487.56 R94.2@1785,2487.56
  other v4: 1250,2100
A0: U9.1 U11.40 | length 1237.8
  Top Layer w10: U9.1@2700,2700 2700,2790 2735,2825 3505.25,2825 3555.25,2875 3700,2875 3739.88,2835.12 U11.40@3739.88,2778.9
A1: U9.2 U11.41 | length 1145.3
  Top Layer w10: U9.2@2750,2700 2750,2785 2774,2809 3511.88,2809 3561.88,2859 3693.37,2859 3708.39,2843.99 U11.41@3708.39,2778.9
A2: U9.3 U11.42 | length 1034.3
  Top Layer w10: U9.3@2800,2700 2800,2775 2818,2793 3518.51,2793 3568.51,2843 3660,2843 3676.89,2826.11 U11.42@3676.89,2778.9
C1+: C2.2 U10.1 | length 125.1
  Top Layer w10: C2.2@3227.68,1890 3227.68,1937.68 3240,1950 U10.1@3240,2010
C1-: C2.1 U10.3 | length 131.5
  Top Layer w10: C2.1@3312.32,1890 3312.32,1942.32 3340,1970 U10.3@3340,2010
C2+: C3.2 U10.4 | length 125.1
  Top Layer w10: C3.2@3377.68,1890 3377.68,1927.68 3390,1940 U10.4@3390,2010
C2-: C3.1 U10.5 | length 129.2
  Top Layer w10: U10.5@3440,2010 3440,1950 3462.32,1927.68 C3.1@3462.32,1890
DEBUG: S3.1 S3.3 U11.44 | length 2990.6
  Top Layer w10: S3.1@2232.05,1611.42 S3.3@2232.05,1788.58 ; v1(3550,2760) 3560,2760 3578.9,2778.9 U11.44@3613.9,2778.9
  Bottom Layer w10: S3.3@2232.05,1788.58 2232.05,2262.05 2360,2390 3780,2390 3840,2450 3840,2730 3820,2750 3560,2750 v1(3550,2760)
GND: C1.1 C5.1 C6.1 C7.1 C8.2 C9.1 C10.1 C11.1 C12.1 C13.1 C14.2 C15.2 C16.1 C17.1 C18.1 C19.1 C20.1 C21.1 C22.1 C23.1 C24.1 C25.1 C26.2 C27.2 C29.1 J10.4 J11.7 J11.8 J11.9 J11.10 LED1.1 LED3.1 LED4.1 Q1.2 Q2.2 Q3.2 Q4.2 Q5.2 Q6.2 Q7.2 Q8.2 Q9.2 Q10.2 Q11.2 Q12.2 Q13.2 Q14.2 Q15.2 Q16.2 R90.2 R96.1 R97.2 R99.2 S1.2 S1.4 S2.2 S2.4 S3.2 S3.4 U1.10 U2.10 U3.10 U4.10 U5.10 U6.10 U7.10 U8.10 U9.4 U9.5 U9.8 U10.15 U11.6 U11.18 U11.28 U11.39 U12.4 U12.8 | length 9136.9
  Top Layer w10: C21.1@1100,3562.6 1100,3510 1125.16,3484.84 U5.10@1181.89,3484.84 v1(1181.89,3351.89) ; C17.1@1100,4562.6 1100,4510 1125.16,4484.84 U1.10@1181.89,4484.84 v1(1181.89,4351.89) ; U12.8@1218.5,2750 v1(1300,2750) ; U12.8@1283.4,2685 U12.4@1571,2685 1684,2685 1696,2673 C29.1@1696,2642.68 R97.2@1785,2642.68 1882.68,2642.68 1902,2662 C13.1@1902,2745.63 2045.46,2745.63 2045.46,2775.46 2067.68,2797.68 C26.2@2164,2797.68 C27.2@2255,2797.68 C15.2@2346,2797.68 C14.2@2436.88,2797.68 ; v5(1460,2320) C11.1@1531.68,2320 ; R96.1@1463.32,2409 C10.1@1532.68,2409 C11.1@1532.68,2321 ; C22.1@1800,3562.6 1800,3510 1825.16,3484.84 U6.10@1881.89,3484.84 v1(1881.89,3351.89) ; v1(1800,4350) C18.1@1800,4562.6 ; v1(1881.89,4351.89) U2.10@1881.89,4484.84 ; S3.2@2487.95,1611.42 2614.17,1611.42 2649.85,1575.73 2732.94,1575.73 R90.2@2770,1612.79 2907.21,1612.79 2989.37,1530.63 LED1.1@3105,1530.63 ; C23.1@2500,3562.6 2500,3520 2535.16,3484.84 U7.10@2581.89,3484.84 v1(2581.89,3351.89) ; v1(2500,4350) C19.1@2500,4562.6 ; v1(2581.89,4351.89) U3.10@2581.89,4484.84 ; v1(2693.2,2575) C25.1@2852.6,2575 2852.6,2697.4 U9.4@2850,2700 U9.5@2900,2700 ; LED4.1@2764.45,1919.37 2893.11,1919.37 2917.88,1894.59 2982.12,1894.59 3006.89,1919.37 LED3.1@3040,1919.37 v1(3129.37,1919.37) ; v2(2940,1200) R99.2@3047.68,1200 ; U9.8@3050,2700 3050,2680 3081.54,2648.46 C7.1@3230,2648.46 ; C16.1@3140,2142.6 3272.6,2142.6 3290,2160 U10.15@3290,2222.6 3290,2315 3283.46,2321.54 C8.2@3230,2321.54 ; C24.1@3200,3562.6 3200,3515 3230.16,3484.84 U8.10@3281.89,3484.84 v1(3281.89,3351.89) ; v1(3200,4350) C20.1@3200,4562.6 ; C7.1@3230,2657.32 3277.32,2657.32 3300,2680 3300,2710 3325,2735 C5.1@3367.68,2735 3375,2735 3436.32,2673.68 3436.32,2620.68 3504.48,2552.52 U11.6@3545,2552.52 ; v1(3281.89,4351.89) U4.10@3281.89,4484.84 ; C6.1@3742.68,2885 3771.38,2856.3 U11.39@3771.38,2778.9 ; C6.1@3747.68,2890 v1(3747.68,2957.68) ; v1(3827.32,2157.32) C1.1@3827.32,2230 3827.32,2267.68 3802.87,2292.13 U11.18@3802.87,2326.14 3802.87,2532.87 3822.52,2552.52 U11.28@3997.76,2552.52 4087.52,2552.52 4100,2565 C9.1@4100,2597.32 ; Q2.2@4474.57,2542.6 4474.57,2511.43 v1(4487,2499) ; Q1.2@4474.57,2692.6 4474.57,2661.43 4482,2654 v1(4526,2654) ; Q4.2@4474.57,2842.6 4474.57,2811.43 4482,2804 v1(4526,2804) ; Q3.2@4474.57,2992.6 4474.57,2961.43 4482,2954 v1(4526,2954) ; Q6.2@4474.57,3142.6 4474.57,3111.43 4482,3104 v1(4526,3104) ; Q5.2@4474.57,3292.6 4474.57,3261.43 4482,3254 v1(4526,3254) ; Q8.2@4474.57,3442.6 4474.57,3411.43 4482,3404 v1(4526,3404) ; Q7.2@4474.57,3592.6 4474.57,3561.43 4482,3554 v1(4526,3554) ; Q10.2@4474.57,3742.6 4474.57,3711.43 4482,3704 v1(4526,3704) ; Q9.2@4474.57,3892.6 4474.57,3861.43 4482,3854 v1(4526,3854) ; Q12.2@4474.57,4042.6 4474.57,4011.43 4482,4004 v1(4526,4004) ; Q11.2@4474.57,4192.6 4474.57,4161.43 4482,4154 v1(4526,4154) ; Q14.2@4474.57,4342.6 4474.57,4311.43 4482,4304 v1(4526,4304) ; Q13.2@4474.57,4492.6 4474.57,4461.43 4482,4454 v1(4526,4454) ; Q15.2@4474.57,4792.6 4430.53,4748.56 4371.03,4748.56 4364.59,4742.12 4364.59,4677.88 4371.03,4671.44 4428.56,4671.44 4457.4,4642.6 Q16.2@4474.57,4642.6 4474.57,4611.43 4482,4604 v1(4526,4604)
  Bottom Layer w10: J11.10@1990,2180 J11.10@2028.58,2180
  other v1: 3142.68,2312.68 1150,2550 1200,2550 1250,2550 1300,2550 1350,2550 1400,2550 1450,2550 1150,2600 1200,2600 1250,2600 1300,2600 1350,2600 1400,2600 1450,2600 1150,2650 1200,2650 1250,2650 1300,2650 1350,2650 1400,2650 1450,2650 1150,2700 1200,2700 1250,2700 1300,2700 1350,2700 1400,2700 1450,2700 1150,2750 1200,2750 1250,2750 1350,2750 1400,2750 1450,2750 3230,2750 1150,2800 1200,2800 1250,2800 1300,2800 1350,2800 1400,2800 1450,2800
  other v4: 1250,1750
INT0: R91.1 U11.11 | length 1048
  Top Layer w10: v1(2880,1970) 2902.32,1970 R91.1@2950,1922.32 ; v1(3440,2130) 3440,2160.24 3461.83,2182.07 3461.83,2351.83 3505.04,2395.04 U11.11@3545,2395.04
  Bottom Layer w10: v1(2880,1970) 3280,1970 v1(3440,2130)
INT1: R92.1 U11.12 | length 1230
  Top Layer w10: R92.1@2680,1922.32 2680,1950 2788,2058 3538,2058 3613.9,2133.9 U11.12@3613.9,2326.14
LEVEL1: R65.1 R66.1 U11.19 | length 831.1
  Top Layer w10: U11.19@3834.37,2326.14 3834.37,2298 3889.37,2243 4051.39,2243 4265,2456.61 4265,2567.32 R66.1@4307.68,2610 R65.1@4307.68,2700
LEVEL2: R67.1 R68.1 U11.20 | length 1078.3
  Top Layer w10: U11.20@3865.87,2326.14 3865.87,2289.13 3896,2259 4044.76,2259 4248,2462.24 4248,2803 4307.68,2862.68 R68.1@4307.68,2910 R67.1@4307.68,3000
LEVEL3: R69.1 R70.1 U11.21 | length 1318.2
  Top Layer w10: U11.21@3897.36,2326.14 3897.36,2292.64 3915,2275 4038.14,2275 4232,2468.86 4232,3072 4307.68,3147.68 R70.1@4307.68,3210 R69.1@4307.68,3300
LEVEL4: R71.1 R72.1 U11.22 | length 1511.5
  Top Layer w10: U11.22@3928.86,2326.14 4066.65,2326.14 4216,2475.49 4216,3351 4307.68,3442.68 R72.1@4307.68,3510 R71.1@4307.68,3600
LEVEL5: R73.1 R74.1 U11.23 | length 1696.6
  Top Layer w10: U11.23@3997.76,2395.04 4112.92,2395.04 4198,2480.12 ; 4200,2483.49 4200,3635 4307.68,3742.68 R74.1@4307.68,3810 R73.1@4307.68,3900
LEVEL6: R75.1 R76.1 U11.24 | length 1974.5
  Top Layer w10: U11.24@3997.76,2426.54 4121.79,2426.54 4182,2486.75 4182,3917 4307.68,4042.68 R76.1@4307.68,4110 R75.1@4307.68,4200
LEVEL7: R77.1 R78.1 U11.25 | length 2248.2
  Top Layer w10: U11.25@3997.76,2458.03 4130.66,2458.03 4166,2493.37 4166,4206 4307.68,4347.68 R78.1@4307.68,4410 R77.1@4307.68,4500
LEVEL8: R80.1 R81.1 U11.26 | length 2525.7
  Top Layer w10: U11.26@3997.76,2489.53 4002.34,2484.94 4134.94,2484.94 4150,2500 4150,4495 4307.68,4652.68 R81.1@4307.68,4710 R80.1@4307.68,4800
LINE0: U1.1 U2.1 U3.1 U4.1 U5.1 U6.1 U7.1 U8.1 U11.43 | length 8868.7
  Top Layer w10: U5.1@1181.89,3715.16 1215.45,3715.16 1238.8,3738.5 1285.71,3738.5 v1(1297.21,3750) ; U1.1@1181.89,4715.16 1215.45,4715.16 1238.8,4738.5 1285.71,4738.5 v1(1297.21,4750) ; U6.1@1881.89,3715.16 1915.45,3715.16 1938.8,3738.5 1985.71,3738.5 v1(1997.21,3750) ; U2.1@1881.89,4715.16 1915.45,4715.16 1938.8,4738.5 1985.71,4738.5 v1(1997.21,4750) ; U7.1@2581.89,3715.16 2615.45,3715.16 2638.8,3738.5 ; U3.1@2581.89,4715.16 2615.45,4715.16 2638.8,4738.5 2685.71,4738.5 v1(2697.21,4750) ; 2639.23,3738.5 2688.5,3738.5 v1(2700,3750) ; U8.1@3281.89,3715.16 3315.45,3715.16 3338.8,3738.5 3385.71,3738.5 v1(3397.21,3750) ; U4.1@3281.89,4715.16 3315.45,4715.16 3338.8,4738.5 3385.71,4738.5 v1(3397.21,4750) ; U11.43@3645.39,2778.9 3645.39,2757.32 3664.34,2738.37 3963.88,2738.37 4065.82,2840.31 4065.82,3404.52 4024,3446.35 4024,3584 4026,3586 4026,3749 v1(4025,3750)
  Bottom Layer w10: v1@1304.21,3757 3390.21,3757 v1(3397.21,3750) 3404.21,3757 4018,3757 v1(4025,3750) 4025,4670 3945,4750 v1(3397.21,4750) 3390.21,4757 2704.21,4757 v1(2697.21,4750) 2690.21,4757 v1@2004.21,4757 ; v1@1304.21,4757 1990.21,4757 v1(1997.21,4750)
LINE1: U1.2 U2.2 U3.2 U4.2 U5.2 U6.2 U7.2 U8.2 U11.37 | length 7809.3
  Top Layer w10: U5.2@1181.89,3689.57 1226.63,3689.57 v1@1249.57,3712.5 ; U1.2@1181.89,4689.57 1226.63,4689.57 v1(1249.57,4712.5) ; U6.2@1881.89,3689.57 1926.63,3689.57 1949.57,3712.5 v1(1962,3712.5) ; U2.2@1881.89,4689.57 1926.63,4689.57 v1@1949.57,4712.5 ; U7.2@2581.89,3689.57 2626.63,3689.57 2649.57,3712.5 v1(2667,3712.5) ; U3.2@2581.89,4689.57 2626.63,4689.57 v1@2649.57,4712.5 ; U8.2@3281.89,3689.57 3326.63,3689.57 3349.57,3712.5 v1(3366,3712.5) 3396.48,3712.5 3423.21,3739.23 3423.21,4685.77 3396.48,4712.5 3349.57,4712.5 3326.63,4689.57 U4.2@3281.89,4689.57 ; U11.37@3834.37,2778.9 3834.37,2812 3873.8,2851.43 3986.43,2851.43 4001.82,2866.82 4001.82,3378.01 3924,3455.84 3924,3711.5 v1(3925,3712.5)
  Bottom Layer w10: v1(1249.57,4712.5) 1247.2,4712.5 1639.44,4712.5 1667.94,4741 1732.06,4741 1760.56,4712.5 2339.44,4712.5 2367.94,4741 2432.06,4741 2460.56,4712.5 3039.44,4712.5 3067.94,4741 3132.06,4741 3160.56,4712.5 v1(3358,4712.5) ; v1(1259,3712.5) 1639.44,3712.5 1667.94,3741 1732.06,3741 1760.56,3712.5 2339.44,3712.5 2367.94,3741 2432.06,3741 2460.56,3712.5 3039.44,3712.5 3067.94,3741 3134,3741 3162.5,3712.5 3739.44,3712.5 3767.94,3741 3832.06,3741 3860.56,3712.5 v1(3925,3712.5)
  other v1: 1950,4712.5 2656,4712.5
LINE2: U1.3 U2.3 U3.3 U4.3 U5.3 U6.3 U7.3 U8.3 U11.36 | length 7773.5
  Top Layer w10: U5.3@1181.89,3663.98 1286.18,3663.98 ; U1.3@1181.89,4663.98 1286.18,4663.98 ; U6.3@1881.89,3663.98 1986.18,3663.98 ; U2.3@1881.89,4663.98 1986.18,4663.98 ; U7.3@2581.89,3663.98 2688.98,3663.98 v1(2700,3675) 2726,3701 2726,4646.21 v1(2697.21,4675) ; U3.3@2581.89,4663.98 2686.18,4663.98 ; U8.3@3281.89,3663.98 3386.18,3663.98 ; U4.3@3281.89,4663.98 3386.18,4663.98 ; U11.36@3865.87,2778.9 3865.87,2820.87 3880.43,2835.43 3993.05,2835.43 4017.82,2860.2 4017.82,3384.64 3949,3453.47 v1@3949,3674
  Bottom Layer w10: v1(1297.21,3675) 1651.94,3675 1667.94,3659 1732.06,3659 1748.06,3675 v1(1997.21,3675) 2351.94,3675 2367.94,3659 2432.06,3659 2448.06,3675 3051.94,3675 3067.94,3659 3132.06,3659 3148.06,3675 v1(3397.21,3675) 3751.94,3675 3767.94,3659 3832.06,3659 3848.06,3675 v1(3950,3675) ; v1(1297.21,4675) 1651.94,4675 1667.94,4659 1732.06,4659 1748.06,4675 v1(1997.21,4675) 2351.94,4675 2367.94,4659 2432.06,4659 2448.06,4675 v1(2697.21,4675) 3051.94,4675 3067.94,4659 3132.06,4659 3148.06,4675 v1(3397.21,4675)
LINE3: U1.4 U2.4 U3.4 U4.4 U5.4 U6.4 U7.4 U8.4 U11.35 | length 7450.4
  Top Layer w10: U5.4@1181.89,3638.38 v1@1247.5,3638.38 ; U1.4@1181.89,4638.38 v1@1247.5,4638.38 ; U6.4@1881.89,3638.38 v1@1962,3638.38 ; U2.4@1881.89,4638.38 v1@1947.5,4638.38 ; U7.4@2581.89,3638.38 v1@2667,3638.38 ; U3.4@2581.89,4638.38 v1@2647.2,4638.38 ; v1@3347.5,4638.38 U4.4@3281.89,4638.38 3253.38,4638.38 3245,4630 3245,3645 3251.62,3638.38 U8.4@3281.89,3638.38 v1@3366,3638.38 ; U11.35@3897.36,2778.9 3897.36,2812.36 3904.43,2819.43 3999.68,2819.43 4033.82,2853.57 4033.82,3391.27 3974,3451.09 v1@3974,3636.5
  Bottom Layer w10: v1@1250.7,4641 1943.7,4641 v1@1947.2,4637.5 ; v1(1259,3637.5) 1262.5,3641 1943.7,3641 1947.2,3637.5 1950.7,3641 3344.88,3641 ; v1@1950.7,4641 2643.7,4641 2647.2,4637.5 2650.7,4641 3343.7,4641 v1@3347.2,4637.5 ; 3348.38,3637.5 3351.88,3641 v1@3971.5,3641
  other v1: 1962,3637.5 3366,3637.5 3975,3637.5 2667,3637.5 1247.2,4637.5 1950,4637.5 2656,4637.5 3358,4637.5
LINE4: U1.5 U2.5 U3.5 U4.5 U5.5 U6.5 U7.5 U8.5 U11.34 | length 7939.2
  Top Layer w10: U5.5@1181.89,3612.79 1183.18,3611.5 1285.71,3611.5 v1(1297.21,3600) ; U1.5@1181.89,4612.79 1183.18,4611.5 1285.71,4611.5 v1(1297.21,4600) ; U6.5@1881.89,3612.79 1883.18,3611.5 1985.71,3611.5 v1(1997.21,3600) 2030,3632.79 2030,4567.21 1985.71,4611.5 1883.18,4611.5 U2.5@1881.89,4612.79 ; U7.5@2581.89,3612.79 2583.18,3611.5 2685.71,3611.5 v1@2697.21,3600 ; U3.5@2581.89,4612.79 2583.18,4611.5 2685.71,4611.5 ; U8.5@3281.89,3612.79 3283.18,3611.5 3385.71,3611.5 v1(3397.21,3600) ; U4.5@3281.89,4612.79 3283.18,4611.5 3385.71,4611.5 v1(3397.21,4600) ; U11.34@3928.86,2778.9 3981.78,2778.9 4049.82,2846.94 4049.82,3397.9 4000,3447.72 v1(4000,3600)
  Bottom Layer w10: v1(1297.21,3600) 1626.94,3600 1667.94,3559 1732.06,3559 1773.06,3600 v1(1997.21,3600) 2326.94,3600 2367.94,3559 2432.06,3559 2473.06,3600 v1(2700,3600) 3026.94,3600 3067.94,3559 3132.06,3559 3173.06,3600 v1(3397.21,3600) 3726.94,3600 3767.94,3559 3832.06,3559 3873.06,3600 v1(4000,3600) ; v1(1297.21,4600) 1626.94,4600 1667.94,4559 1732.06,4559 1773.06,4600 v1(1997.21,4600) 2326.94,4600 2367.94,4559 2432.06,4559 2473.06,4600 v1(2697.21,4600) 3026.94,4600 3067.94,4559 3132.06,4559 3173.06,4600 v1(3397.21,4600)